# EAGLE board tiny24marquee (EAGLE 6.2)

Size 91.44 x 25.4 mm. Coordinates in mm from the lower left corner, seen from the top.
Outline: 91.44,0 0,0 0,25.4 91.44,25.4 91.44,0
Copper layers (1*16): Top 0.035mm / dielectric 1.5mm / Bottom 0.035mm
Design rules: minimum track width 10mil, minimum drill 24mil, track to track 8mil, track to pad 8mil, pad to pad 8mil, via to via 8mil, smd to smd 8mil, copper to edge 40mil, drill to drill 8mil, minimum pad ring 10mil, minimum via ring 8mil, stop-mask expansion 4mil, vias tented up to drill 0mil, thermal gap 10mil
Holes 3.2 mm at 86.36,5.08 5.08,5.08 86.36,20.32 5.08,20.32

## Footprints (pad centres in the part's own frame; a part is rotated, then mirrored left to right if it is on the bottom)
LED3MM = drill 0.813 octagon: A -1.27,0; K 1.27,0
1X01 = drill 1.016 octagon: 1 0,0
0204/7 = drill 0.813 octagon: 1 -3.81,0; 2 3.81,0
SO14 = smd 0.61 x 2.21: 1 -3.81,-2.603; 2 -2.54,-2.603; 3 -1.27,-2.603; 4 0,-2.603; 5 1.27,-2.603; 6 2.54,-2.603; 7 3.81,-2.603; 8 3.81,2.603; 9 2.54,2.603; 10 1.27,2.603; 11 0,2.603; 12 -1.27,2.603; 13 -2.54,2.603; 14 -3.81,2.603
1X04_LOCK = drill 1.016 pad 1.88 square: 1 0,0.127 | drill 1.016 pad 1.88: 2 2.54,-0.127; 3 5.08,0.127; 4 7.62,-0.127
C050-025X075 = drill 0.813 octagon: 1 -2.54,0; 2 2.54,0

## Placement (x,y rotation side)
00  [LED3MM]  43.18,2.54 180 top
01  [LED3MM]  43.18,7.62 180 top
02  [LED3MM]  43.18,12.7 180 top
03  [LED3MM]  43.18,17.78 180 top
04  [LED3MM]  43.18,22.86 180 top
05  [LED3MM]  88.9,2.54 180 top
06  [LED3MM]  88.9,7.62 180 top
07  [LED3MM]  88.9,12.7 180 top
08  [LED3MM]  88.9,17.78 180 top
09  [LED3MM]  88.9,22.86 180 top
10  [LED3MM]  38.1,2.54 180 top
11  [LED3MM]  38.1,7.62 180 top
12  [LED3MM]  38.1,12.7 180 top
13  [LED3MM]  38.1,17.78 180 top
14  [LED3MM]  38.1,22.86 180 top
15  [LED3MM]  83.82,2.54 180 top
16  [LED3MM]  83.82,7.62 180 top
17  [LED3MM]  83.82,12.7 180 top
18  [LED3MM]  83.82,17.78 180 top
19  [LED3MM]  83.82,22.86 180 top
20  [LED3MM]  33.02,2.54 180 top
21  [LED3MM]  33.02,7.62 180 top
22  [LED3MM]  33.02,12.7 180 top
23  [LED3MM]  33.02,17.78 180 top
24  [LED3MM]  33.02,22.86 180 top
25  [LED3MM]  78.74,2.54 180 top
26  [LED3MM]  78.74,7.62 180 top
27  [LED3MM]  78.74,12.7 180 top
28  [LED3MM]  78.74,17.78 180 top
29  [LED3MM]  78.74,22.86 180 top
30  [LED3MM]  27.94,2.54 180 top
31  [LED3MM]  27.94,7.62 180 top
32  [LED3MM]  27.94,12.7 180 top
33  [LED3MM]  27.94,17.78 180 top
34  [LED3MM]  27.94,22.86 180 top
35  [LED3MM]  73.66,2.54 180 top
36  [LED3MM]  73.66,7.62 180 top
37  [LED3MM]  73.66,12.7 180 top
38  [LED3MM]  73.66,17.78 180 top
39  [LED3MM]  73.66,22.86 180 top
40  [LED3MM]  22.86,2.54 180 top
41  [LED3MM]  22.86,7.62 180 top
42  [LED3MM]  22.86,12.7 180 top
43  [LED3MM]  22.86,17.78 180 top
44  [LED3MM]  22.86,22.86 180 top
45  [LED3MM]  68.58,2.54 180 top
46  [LED3MM]  68.58,7.62 180 top
47  [LED3MM]  68.58,12.7 180 top
48  [LED3MM]  68.58,17.78 180 top
49  [LED3MM]  68.58,22.86 180 top
50  [LED3MM]  17.78,2.54 180 top
51  [LED3MM]  17.78,7.62 180 top
52  [LED3MM]  17.78,12.7 180 top
53  [LED3MM]  17.78,17.78 180 top
54  [LED3MM]  17.78,22.86 180 top
55  [LED3MM]  63.5,2.54 180 top
56  [LED3MM]  63.5,7.62 180 top
57  [LED3MM]  63.5,12.7 180 top
58  [LED3MM]  63.5,17.78 180 top
59  [LED3MM]  63.5,22.86 180 top
60  [LED3MM]  12.7,2.54 180 top
61  [LED3MM]  12.7,7.62 180 top
62  [LED3MM]  12.7,12.7 180 top
63  [LED3MM]  12.7,17.78 180 top
64  [LED3MM]  12.7,22.86 180 top
65  [LED3MM]  58.42,2.54 180 top
66  [LED3MM]  58.42,7.62 180 top
67  [LED3MM]  58.42,12.7 180 top
68  [LED3MM]  58.42,17.78 180 top
69  [LED3MM]  58.42,22.86 180 top
70  [LED3MM]  7.62,2.54 180 top
71  [LED3MM]  7.62,7.62 180 top
72  [LED3MM]  7.62,12.7 180 top
73  [LED3MM]  7.62,17.78 180 top
74  [LED3MM]  7.62,22.86 180 top
75  [LED3MM]  53.34,2.54 180 top
76  [LED3MM]  53.34,7.62 180 top
77  [LED3MM]  53.34,12.7 180 top
78  [LED3MM]  53.34,17.78 180 top
79  [LED3MM]  53.34,22.86 180 top
80  [LED3MM]  2.54,2.54 180 top
81  [LED3MM]  2.54,7.62 180 top
82  [LED3MM]  2.54,12.7 180 top
83  [LED3MM]  2.54,17.78 180 top
84  [LED3MM]  2.54,22.86 180 top
85  [LED3MM]  48.26,2.54 180 top
86  [LED3MM]  48.26,7.62 180 top
87  [LED3MM]  48.26,12.7 180 top
88  [LED3MM]  48.26,17.78 180 top
89  [LED3MM]  48.26,22.86 180 top
H0  [1X01]  20.32,20.32 90 top
H1  [1X01]  17.78,20.32 90 top
H2  [1X01]  15.24,20.32 90 top
H3  [1X01]  12.7,20.32 90 top
H4  [1X01]  10.16,20.32 90 top
H5  [1X01]  33.02,20.32 90 top
H6  [1X01]  30.48,20.32 90 top
H7  [1X01]  27.94,20.32 90 top
H8  [1X01]  25.4,20.32 90 top
H9  [1X01]  22.86,20.32 90 top
H10  [0204/7]  71.12,12.7 90 top
H11  [SO14]  63.5,12.7 180 bottom
H12  [1X04_LOCK]  81.28,20.32 180 top
H13  [C050-025X075]  55.88,12.7 270 top
H14  [C050-025X075]  50.8,12.7 270 top

## Library data of the parts
00 01-09 10-89 = led
H0 H1-H9 = pinhead
H10 H13 H14 = rcl
H11 = avr-5-4.16
H12 = SparkFun

## Nets
D: 00.A 09.K 11.A 19.K 22.A 29.K 33.A 39.K 44.A 49.K 55.A 59.K 66.A 69.K 77.A 79.K 88.A 89.K H9.1 H11.8
S0: 00.K 01.A 02.A 03.A 04.A 05.A 06.A 07.A 08.A 09.A 10.K 20.K 30.K 40.K 50.K 60.K 70.K 80.K H0.1 H11.9
S1: 01.K 10.A 11.K 12.A 13.A 14.A 15.A 16.A 17.A 18.A 19.A 21.K 31.K 41.K 51.K 61.K 71.K 81.K H1.1 H11.10
S2: 02.K 12.K 20.A 21.A 22.K 23.A 24.A 25.A 26.A 27.A 28.A 29.A 32.K 42.K 52.K 62.K 72.K 82.K H2.1 H11.11
S3: 03.K 13.K 23.K 30.A 31.A 32.A 33.K 34.A 35.A 36.A 37.A 38.A 39.A 43.K 53.K 63.K 73.K 83.K H3.1 H11.12
S4: 04.K 14.K 24.K 34.K 40.A 41.A 42.A 43.A 44.K 45.A 46.A 47.A 48.A 49.A 54.K 64.K 74.K 84.K H4.1 H11.13
S5: 05.K 15.K 25.K 35.K 45.K 50.A 51.A 52.A 53.A 54.A 55.K 56.A 57.A 58.A 59.A 65.K 75.K 85.K H5.1 H11.3 H12.2
S6: 06.K 16.K 26.K 36.K 46.K 56.K 60.A 61.A 62.A 63.A 64.A 65.A 66.K 67.A 68.A 69.A 76.K 86.K H6.1 H11.2
S7: 07.K 17.K 27.K 37.K 47.K 57.K 67.K 70.A 71.A 72.A 73.A 74.A 75.A 76.A 77.K 78.A 79.A 87.K H7.1 H11.6
S8: 08.K 18.K 28.K 38.K 48.K 58.K 68.K 78.K 80.A 81.A 82.A 83.A 84.A 85.A 86.A 87.A 88.K 89.A H8.1 H11.7
S$1: H10.1 H11.1 H12.4 H13.1 H14.1
S$2: H10.2 H11.4
S$3: H11.14 H12.1 H13.2 H14.2
S$4: H11.5 H12.3

## Tracks (layer width: path | path; a pad name or v marks a point on that pad's centre or on a via)
D  (19 unrouted)
S0  (19 unrouted)
S1  (19 unrouted)
S2  (19 unrouted)
S3  (19 unrouted)
S4  (19 unrouted)
S5  (20 unrouted)
S6  (19 unrouted)
S7  (19 unrouted)
S8  (19 unrouted)
S$1  (4 unrouted)
S$2  (1 unrouted)
S$3  (3 unrouted)
S$4  (1 unrouted)